# Altium PCB lwpGuitar.pcbdoc
Units mm, origin at the board's own origin, x right, y up, seen from the top; angles counter-clockwise.
Board outline 360 x 5440.04 mm, 2 copper layers (Top Layer, Bottom Layer); 1 components, 0 nets, 0 pads, 0 vias.

## Layer stack, top to bottom
Top Layer: signal copper (thickness not stored)
Dielectric: dielectric 0.32, FR-4, Dk 4.8
Bottom Layer: signal copper (thickness not stored)

## Board outline
385.4,25.4 25.4,25.4 25.4,5465.441 385.4,5465.441

## Components (designator, comment, footprint, x,y, rotation, side; value= is the part's Value field where it differs from the comment)
IMPORTED_IMAGE "IMPORTED_IMAGE" IMPORTED_IMAGE 168.989,148.634 r0 top

## Footprints (in the part's own frame and the unit in brackets; to place one, negate y for a bottom-side part, rotate by r counter-clockwise, add the part's x,y. Pads: shape width x height; smd on the part's side, far side on the other; paste and mask are expansions set on the pad)
IMPORTED_IMAGE [mm]
  silkscreen extent 0,-102.49 79.42,0

## Nets (pads, with @x,y where several pads share a name; then routed paths per layer and width w, separated by ;. In a path a pad name is that pad's centre, name@x,y a point inside that pad or via, vN(x,y) a via of type N, cw(c..) or ccw(c..) an arc to the next point about the centre after c; other vN are vias at no path point)

## Silkscreen, mask and mechanical layers (free items; w line width, h text height)
Document:
  lines w0.003: 205.374,2745.395 205.425,2745.446